# Altium PCB MB_v1.PcbDoc (part 9 of 10)
Units mm, origin at the board's own origin, x right, y up, seen from the top; angles counter-clockwise.
Board outline 203 x 72 mm, 6 copper layers (Top Layer, Layer 3, Layer 1, Layer 2, Layer 4, Bottom Layer), stack 1.52 mm thick; 655 components, 569 nets, 2943 pads, 1834 vias.
Unrouted connection lines stored in the file: 31.
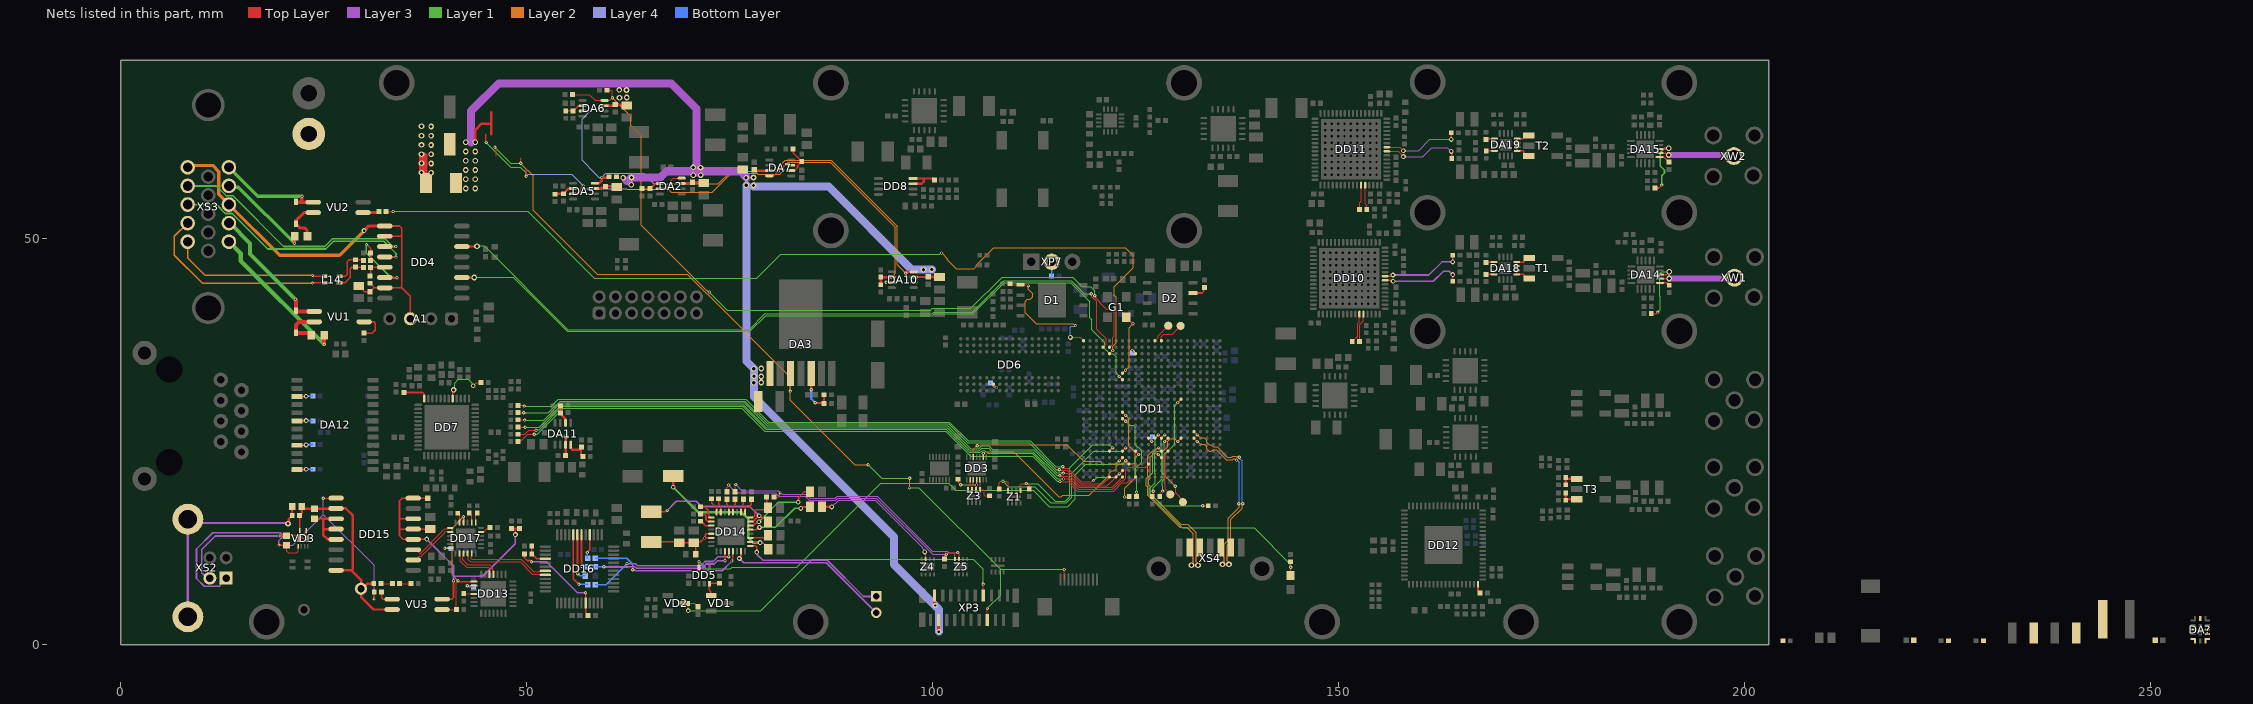
[diagram p12: the nets of this part, all layers, seen from the top]

## Via types
v1: diameter 0.4, hole 0.2, Top Layer to Bottom Layer, tented both sides, 654 vias
v2: diameter 0.8, hole 0.4, Top Layer to Bottom Layer, tented both sides, 489 vias
v3: diameter 0.6, hole 0.3, Top Layer to Bottom Layer, tented both sides, 354 vias
v4: diameter 0.7, hole 0.4, Top Layer to Bottom Layer, tented both sides, 144 vias
v5: diameter 0.8, hole 0.4, Top Layer to Bottom Layer, 87 vias
v6: diameter 0.9, hole 0.5, Top Layer to Bottom Layer, 45 vias
v7: diameter 0.66, hole 0.4, Top Layer to Bottom Layer, 25 vias
v8: diameter 0.7, hole 0.3, Top Layer to Bottom Layer, 13 vias
v9: diameter 0.5, hole 0.2, Top Layer to Bottom Layer, 12 vias
v10: diameter 0.5, hole 0.3, Top Layer to Bottom Layer, 5 vias
v11: diameter 1, hole 0.5, Top Layer to Bottom Layer, 2 vias
v12: diameter 0.4, hole 0.2, Top Layer to Bottom Layer, 2 vias
v13: diameter 0.9, hole 0.4, Top Layer to Bottom Layer, tented both sides, 2 vias

## Nets (pads, with @x,y where several pads share a name; then routed paths per layer and width w, separated by ;. In a path a pad name is that pad's centre, name@x,y a point inside that pad or via, vN(x,y) a via of type N, cw(c..) or ccw(c..) an arc to the next point about the centre after c; other vN are vias at no path point) (continued)
NetC327_2: C327.2 C346.2 DD15.12 DD15.13 DD15.14 DD15.16 R170.1 R172.1 VU3.4 | length 39.2
  Top Layer w0.2: DD15.14@36.043,15.494 34.35,15.494 ; v3@37.725,12.975 37.704,12.954 DD15.12@36.043,12.954 34.796,12.954 34.35,13.4 34.35,14.175 ; C346.2@37.825,18.02 37.811,18.034 DD15.16@36.043,18.034 34.684,18.034 34.35,17.7 34.35,15.494 ; C327.2@38.15,14.225 38.149,14.224 DD15.13@36.043,14.224 34.399,14.224 34.35,14.175 ; VU3.4@39.6,5.585 40.785,5.585 41,5.8 v1(41,7.85) ; R172.1@48.15,14.3 48.65,14.3 ; v3(48.625,13.55) 48.625,14.275 48.65,14.3 ; R170.1@49.15,14.3 48.65,14.3 ; 34.35,14.175 34.35,15.494
  Layer 3 w0.2: v3(37.71,12.99) 40.95,9.75 ; v1(41,7.85) 41,8.4 ; 41,9.75 41,8.4 ; v3(48.625,13.55) 48.625,12.4 44.625,8.4 41,8.4
NetC331_1: C331.1 DD16.30 | length 4.7
  Top Layer w0.2: v1@56.775,9.625 DD16.30@56.775,13.525
  Bottom Layer w0.2: v1(56.775,9.636) 57.479,9.636 C331.1@57.54,9.575
NetC331_2: C331.2 DD14.19 | length 17.7
  Top Layer w0.2: DD14.19@74.425,11.5 74.425,10.35 v1(74.45,10.325)
  Layer 3 w0.2: v1(59.506,9.593) 59.538,9.561 62.541,9.561 62.58,9.6 63.351,9.6 63.551,9.4 71.575,9.4 72.1,9.925 73.124,9.925 73.524,10.325 v1(74.45,10.325)
  Bottom Layer w0.2: C331.2@58.46,9.575 59.525,9.575 v1@59.55,9.55
NetC332_1: C332.1 DD16.32 | length 7.5
  Top Layer w0.2: DD16.32@55.775,13.525 55.775,8.1 v1@56.45,7.425
  Bottom Layer w0.2: v1(56.45,7.436) 57.479,7.436 C332.1@57.54,7.375
NetC332_2: C332.2 DD14.20 | length 18.8
  Top Layer w0.2: v1(74.925,10.8) DD14.20@74.925,11.5
  Layer 3 w0.2: v1(62.375,9.961) 63.414,9.961 63.675,9.7 71.451,9.7 71.976,10.225 73,10.225 73.575,10.8 v1(74.925,10.8)
  Bottom Layer w0.2: C332.2@58.46,7.375 59.8,7.375 v1@62.375,9.95
NetC334_1: C334.1 DD16.28 | length 3.1
  Top Layer w0.2: v1(57.475,11.325) 57.475,11.379 57.775,11.679 DD16.28@57.775,13.525
  Bottom Layer w0.2: v1(57.475,11.325) 57.475,10.69 C334.1@57.54,10.625
NetC334_2: C334.2 DD14.21 | length 19.6
  Top Layer w0.2: v1(75.3,10.3) 75.3,10.354 75.425,10.479 DD14.21@75.425,11.5
  Layer 3 w0.2: v1(63.1,9.2) 63.138,9.162 63.365,9.162 63.426,9.1 74.1,9.1 v1(75.3,10.3)
  Bottom Layer w0.2: C334.2@58.46,10.625 62.35,10.625 63.1,9.875 v1(63.1,9.2)
NetC341_2: C341.2 DD14.1 | length 2.2
  Top Layer w0.2: DD14.1@76.925,16.3 76.925,16.9 77.125,17.1 77.573,17.1 77.69,17.217 77.69,17.867 C341.2@77.728,17.905
NetC342_2: C342.2 DD14.2 | length 1.7
  Top Layer w0.2: DD14.2@76.425,16.3 76.425,16.975 76.702,17.252 C342.2@76.702,17.895
NetC344_2: C344.2 DD14.4 | length 1.7
  Top Layer w0.2: DD14.4@75.425,16.3 75.425,17 75.696,17.271 C344.2@75.696,17.905
NetC345_2: C345.2 DD14.5 | length 1.7
  Top Layer w0.2: C345.2@74.68,17.905 74.675,17.9 74.675,17.25 74.925,17 DD14.5@74.925,16.3
NetC347_1: C347.1 C348.1 DD14.13 DD14.14 L60.2 L61.1 | length 10.4
  Top Layer w0.2: L61.1@65.35,12.65 68.723,12.65 C348.1@68.838,12.535 C347.1@70.616,12.535 ; L60.2@70.865,11.126 70.865,12.514 70.73,12.649 71.449,12.649 v1(71.925,13.125) ; DD14.14@72.775,13.15 71.95,13.15 v1(71.925,13.125) ; DD14.13@72.775,13.65 72.142,13.65 72.025,13.533 72.025,13.279 71.925,13.179 v1(71.925,13.125)
NetC349_1: C349.1 C352.1 C357.2 C358.1 DD15.2 DD15.8 R175.2 R178.2 VD3.5 VU3.2 XS2.4 | length 48.8
  Top Layer w0.2: v1(19.5,13.375) 19.554,13.375 19.606,13.427 C358.1@20.447,13.427 21.658,13.427 21.684,13.401 21.879,13.401 22.004,13.276 VD3.5@22.004,13.081 ; R178.2@22.04,15.875 22.079,15.836 VD3.5@22.079,14.056 22.079,13.156 VD3.5@22.004,13.081 ; VD3.5@22.879,14.056 22.879,13.156 VD3.5@22.954,13.081 VD3.5@22.004,13.081
  Top Layer w0.3: R178.2@22.04,15.875 22.317,16.152 C357.2@22.317,17.018 ; C357.2@22.317,16.993 22.567,16.743 22.725,16.743 22.743,16.725 C349.1@23.875,16.725 26.504,16.725 DD15.2@26.543,16.764 27.736,16.764 28.623,15.877 28.623,9.32 28.447,9.144 ; DD15.8@26.543,9.144 28.447,9.144 ; R175.2@31.189,7.5 30.393,7.5 29.768,6.875 C352.1@29.617,6.875 ; VU3.2@33.45,4.315 31.16,4.315 29.624,5.851 29.624,6.868 C352.1@29.617,6.875 ; 28.447,9.144 29.617,7.974 C352.1@29.617,6.875
  Layer 3 w0.2: XS2.4@10.997,8.183 10.642,8.183 9.997,8.828 9.997,11.697 11.675,13.375 v1(19.5,13.375)
NetC349_2: C349.2 DD15.3 DD15.4 DD15.5 | length 8.2
  Top Layer w0.3: C349.2@23.875,15.525 24.95,15.525 ; DD15.5@26.543,12.954 26.511,12.986 25.464,12.986 24.95,13.5 24.95,14.412 ; DD15.4@26.543,14.224 25.138,14.224 24.95,14.412 ; DD15.3@26.543,15.494 26.537,15.5 25.126,15.5 25.101,15.525 24.95,15.525 ; 24.95,14.412 24.95,15.525
NetC350_1: C350.1 DD14.27 | length 2.3
  Top Layer w0.2: DD14.27@77.575,13.15 79.458,13.15 C350.1@79.769,13.462
NetC351_1: C351.1 DD14.32 R171.1 | length 4.4
  Top Layer w0.2: DD14.32@77.575,15.65 77.585,15.66 77.91,15.66 78.1,15.85 78.1,16.508 78.217,16.625 79.525,16.625 C351.1@79.725,16.825 79.575,16.975 R171.1@79.575,18.175
NetC353_1: C353.1 DD14.31 L61.2 | length 17.1
  Top Layer w0.2: L61.2@65.35,16.35 67.108,16.35 67.283,16.525 v1(67.325,16.525) ; DD14.31@77.575,15.15 77.585,15.16 77.962,15.16 78.107,15.304 78.107,15.356 78.614,15.864 v3(78.65,15.864) ; v3@78.65,15.85 78.669,15.85 78.968,15.551 79.538,15.551 C353.1@79.645,15.444
  Layer 3 w0.2: v1(67.325,16.525) 68.45,17.65 70.925,17.65 71.575,17 77.514,17 v3(78.65,15.864)
NetC354_1: C354.1 DD14.26 L62.2 | length 18.4
  Top Layer w0.2: DD14.26@77.575,12.65 78.567,12.65 78.667,12.55 v3(78.775,12.55) 78.852,12.473 79.202,12.473 79.506,12.169 C354.1@79.506,12.13
  Top Layer w0.3: v3(68.075,19.375) L62.2@68.075,20.75
  Layer 1 w0.3: v3(68.075,19.375) 71.175,16.275 76.5,16.275 77.325,15.45 77.325,13.125 77.9,12.55 v3(78.775,12.55)
NetC355_2: C355.2 DD14.29 | length 8.5
  Top Layer w0.2: DD14.29@77.575,14.15 78.308,14.15 78.591,14.434 v3(78.7,14.434) ; v3(83.775,16.775) 83.883,16.775 84.058,16.95 C355.2@84.9,16.95
  Layer 1 w0.2: v3(78.7,14.434) 80.659,14.434 83.025,16.8 83.75,16.8 v3(83.775,16.775)
NetC356_2: C356.2 DD14.30 | length 9.4
  Top Layer w0.2: DD14.30@77.575,14.65 77.864,14.65 78.048,14.835 78.154,14.835 78.269,14.949 78.335,14.949 78.521,15.135 v3(78.629,15.135) ; v3(83.475,17.525) 83.5,17.55 83.5,18.125 84.175,18.8 C356.2@84.9,18.8
  Layer 1 w0.2: v3(78.629,15.135) 81.044,17.55 83.45,17.55 v3(83.475,17.525)
NetC357_1: C357.1 R178.1 XS2.5 | length 26.9
  Top Layer w0.3: v4(20.625,14.9) 20.702,14.977 20.702,15.437 R178.1@21.14,15.875 21.117,15.898 C357.1@21.117,17.018
  Layer 3 w0.3: XS2.5@8.287,3.413 XS2.5@8.287,15.453 8.763,14.977 20.548,14.977 v4(20.625,14.9)
NetC358_2: C358.2 DD15.1 R169.1 VD3.1 XS2.1 | length 49.5
  Top Layer w0.125: C358.2@20.447,12.227 20.447,11.478 20.625,11.3 21.675,11.3 21.866,11.491 21.866,11.575 21.879,11.588 VD3.1@21.879,12.106 ; v1(24.975,18.025) 24.984,18.034 DD15.1@26.543,18.034 ; v1(31.225,5.625) 31.25,5.65 R169.1@31.25,6.475
  Top Layer w0.2: v1(19.5,12.25) 19.523,12.227 C358.2@20.447,12.227
  Layer 3 w0.125: v1(19.5,12.25) 21.225,12.25 24.975,16 ; v1(24.975,18.025) 24.975,16 ; v1(31.225,5.625) 31.225,9.75 24.975,16
  Layer 3 w0.2: XS2.1@12.997,8.183 12.297,7.483 12.297,7.3 12.18,7.183 10.292,7.183 9.35,8.125 9.35,11.775 11.35,13.775 19.666,13.775 19.9,13.541 19.9,13.209 19.5,12.809 v1(19.5,12.25)
NetC?_1: C?.1@250.628,0.526 DA?.3 DA?.12 L?.1
NetC?_2: C?.2@220.872,0.526 DA?.5
NetD1_1: D1.1 DD1.A1 R22.1 | length 17.2
  Top Layer w0.125: R22.1@109.55,44.45 109.685,44.315 D1.1@110.86,44.315 111.611,44.315 111.751,44.175 v1(111.825,44.175) ; v3(116.985,37.846) 118.191,37.846 DD1.A1@118.612,37.425
  Layer 2 w0.125: v1(111.825,44.175) 111.825,43.779 112.363,43.242 112.363,42.858 112.042,42.538 111.706,42.538 111.425,42.257 111.425,40.85 112.775,39.5 117.319,39.5 117.527,39.291 v1(117.63,39.291)
  Bottom Layer w0.125: v3(116.985,37.846) 116.985,39.116 117.08,39.211 117.549,39.211 v1(117.63,39.291)
NetD2_3: D2.3 R26.2 | length 1.9
  Top Layer w0.2: D2.3@132.098,43.307 133.207,43.307 133.417,43.517 133.417,43.922 R26.2@133.495,44
NetDA2_6: DA2.6 R7.1 R8.1 | length 2.5
  Top Layer w0.2: R8.1@64.212,56.164 R7.1@65.228,56.164 65.843,56.779 66.396,56.779 DA2.6@66.418,56.801
NetDA3_5: DA3.5 R4.1 R9.1 | length 6
  Top Layer w0.25: DA3.5@85.07,33.37 85.075,33.365 v1(85.075,31.4) ; v1(85.575,29.775) 85.604,29.746 86.579,29.746 R9.1@86.65,29.675 R4.1@86.65,30.775
  Bottom Layer w0.25: v1(85.075,31.4) 85.075,30.275 v1(85.575,29.775)
NetDA5_6: DA5.6 R13.1 R14.1 | length 2.3
  Top Layer w0.3: R14.1@53.647,55.537 R13.1@54.536,55.537 55.163,56.164 55.716,56.164 DA5.6@55.726,56.174
NetDA6_6: DA6.6 R15.1 R16.1 | length 2.3
  Top Layer w0.2: R16.1@54.841,65.735 R15.1@55.73,65.735 55.93,65.935 55.96,65.935 56.368,66.343 56.891,66.343 DA6.6@56.92,66.372
NetDA7_6: DA7.6 R17.1 R18.1 | length 3.9
  Top Layer w0.2: DA7.6@82.605,58.383 82.971,58.383 83.046,58.458 83.083,58.458 83.382,58.757 83.382,58.985 R18.1@83.902,59.505 82.838,60.569 82.838,61.042 R17.1@82.828,61.052
NetDA8_1: DA8.1 F1.2 VU1.4 | length 5.4
  Top Layer w0.5: F1.2@23.495,38.1 23.495,38.135 23.275,38.355 23.028,38.355 22.982,38.401 DA8.1@21.59,38.401 21.59,39.34 21.982,39.732 23.83,39.732 VU1.4@23.849,39.751
NetDA9_1: DA9.1 F3.2 VU2.4 | length 5.5
  Top Layer w0.4: F3.2@23.015,50.292 22.962,50.345 22.962,51.066 22.728,51.3 22.153,51.3 21.79,51.663 21.64,51.663 21.59,51.713 DA9.1@21.59,51.863 21.64,51.913 21.64,52.263 22.59,53.213 VU2.4@23.722,53.213
NetDA10_6: DA10.6 R50.1 R51.1 | length 2.3
  Top Layer w0.3: R50.1@93.634,44.319 R51.1@93.634,45.255 93.645,45.266 DA10.6@94.998,45.266
NetDA11_6: DA11.6 R63.1 R64.1 | length 2.3
  Top Layer w0.3: R64.1@54.171,29.395 R63.1@54.171,28.506 54.321,28.356 54.321,28.279 54.798,27.802 54.798,27.326 DA11.6@54.808,27.316
NetDA12_15: DA12.15 R82.1 | length 1.9
  Top Layer w0.125: DA12.15@21.741,30.551 v3@22.821,30.551
  Bottom Layer w0.2: v3(22.86,30.59) 22.877,30.607 R82.1@23.68,30.607
NetDA12_18: DA12.18 R84.1 | length 1.9
  Top Layer w0.125: DA12.18@21.741,27.551 v3@22.821,27.551
  Bottom Layer w0.2: v3(22.86,27.59) 22.891,27.559 R84.1@23.68,27.559
NetDA12_21: DA12.21 R85.1 | length 1.9
  Top Layer w0.125: DA12.21@21.741,24.551 v3@22.821,24.551
  Bottom Layer w0.2: v3(22.86,24.59) 22.908,24.638 R85.1@23.68,24.638
NetDA12_24: DA12.24 R86.1 | length 2
  Top Layer w0.125: DA12.24@21.741,21.551 22.821,21.551 v3(22.86,21.59)
  Bottom Layer w0.2: v3(22.86,21.59) R86.1@23.68,21.59
NetDA14_1: DA14.1 R96.2 | length 1.3
  Top Layer w0.2: DA14.1@189.609,44.565 190.464,44.565 R96.2@190.764,44.265
NetDA14_2: DA14.2 XW1.1 | length 9
  Top Layer w0.2: DA14.2@189.609,45.065 189.619,45.075 190.754,45.075 v4(190.764,45.085)
  Layer 3 w0.7: v4(190.764,45.085) XW1.1@198.645,45.085
NetDA14_3: DA14.3 R88.1 | length 8.3
  Top Layer w0.125: R88.1@188.547,40.767 189.139,40.767 189.322,40.95 v1(189.35,40.95)
  Top Layer w0.2: DA14.3@189.609,45.565 190.409,45.565 190.754,45.91 v4(190.764,45.91)
  Layer 1 w0.125: v1(189.35,40.95) 189.638,41.238 189.638,42.825 189.575,42.888 189.575,45.677 189.808,45.91 v4(190.764,45.91)
NetDA15_1: DA15.1 R97.2 | length 1.4
  Top Layer w0.2: DA15.1@189.546,60.035 189.555,60.026 190.106,60.026 R97.2@190.709,59.423
NetDA15_2: DA15.2 XW2.1 | length 9.3
  Top Layer w0.2: DA15.2@189.546,60.535 190.346,60.535 190.58,60.301 v4(190.709,60.301)
  Layer 3 w0.5: XW2.1@198.59,60.301 XW2.1@198.717,60.174
  Layer 3 w0.7: v4(190.709,60.301) XW2.1@198.59,60.301
NetDA15_3: DA15.3 R91.1 | length 7.8
  Top Layer w0.2: R91.1@189,56.237 189.487,56.237 v1(189.85,56.6) ; DA15.3@189.546,61.035 189.555,61.045 190.627,61.045 v4(190.709,61.126)
  Layer 1 w0.2: v1(189.85,56.6) 189.85,57.759 190.175,58.084 190.175,58.416 189.65,58.941 189.65,60.604 190.173,61.126 v4(190.709,61.126)
NetDA18_5: DA18.5 R110.1 | length 1
  Top Layer w0.2: R110.1@168.175,47.05 168.23,47.105 DA18.5@169.171,47.105
NetDA18_8: DA18.8 R109.1 | length 1
  Top Layer w0.2: R109.1@168.2,45.6 168.205,45.605 DA18.8@169.171,45.605
NetDA18_13: DA18.13 DA18.14 T1.1 | length 2.3
  Top Layer w0.2: DA18.14@171.971,46.105 DA18.13@171.971,45.605 172.783,45.605 172.9,45.488 172.9,45.385 173.18,45.105 T1.1@173.5,45.105
NetDA18_15: DA18.15 DA18.16 T1.3 | length 2.3
  Top Layer w0.2: DA18.15@171.971,46.605 DA18.16@171.971,47.105 172.783,47.105 172.9,47.222 172.9,47.325 173.18,47.605 T1.3@173.5,47.605
NetDA19_5: DA19.5 R112.1 | length 1.1
  Top Layer w0.2: R112.1@168.2,62.2 168.318,62.318 DA19.5@169.231,62.318
NetDA19_8: DA19.8 R111.1 | length 1
  Top Layer w0.2: R111.1@168.225,60.8 168.243,60.818 DA19.8@169.231,60.818
NetDA19_13: DA19.13 DA19.14 T2.1 | length 2.3
  Top Layer w0.2: DA19.14@172.031,61.318 DA19.13@172.031,60.818 172.756,60.818 172.873,60.701 172.873,60.474 173.153,60.194 T2.1@173.445,60.194
NetDA19_15: DA19.15 DA19.16 T2.3 | length 2.1
  Top Layer w0.2: DA19.15@172.031,61.818 DA19.16@172.031,62.318 172.749,62.318 173.125,62.694 T2.3@173.445,62.694
NetDA?_7: DA?.7 R?.1@204.761,0.476 R?.2@229.462,0.476
NetDD1_A12: DD1.A12 X2.1 | length 2.5
  Top Layer w0.125: DD1.A12@127.412,37.425 127.412,37.459 127.8,37.847 127.8,38.028 X2.1@129.048,39.276
NetDD1_A13: DD1.A13 X1.1 | length 3.4
  Top Layer w0.125: DD1.A13@128.212,37.425 128.212,37.941 128.521,38.25 129.557,38.25 X1.1@130.565,39.259
NetDD1_AA7: DD1.AA7 R60.2 | length 79.6
  Top Layer w0.125: R60.2@48.964,29.464 49.562,29.464 49.651,29.375 v1(49.725,29.375) ; v1(116.05,21.9) 116.073,21.9 116.261,21.713 116.674,21.713 118.361,20.025 119.639,20.025 119.814,20.2 v1(119.85,20.2)
  Top Layer w0.2: v1(123.011,21.024) DD1.AA7@123.412,21.425
  Layer 1 w0.125: v1(49.725,29.375) 53.072,29.375 53.922,30.225 76.995,30.225 79.82,27.4 102.095,27.4 104.42,25.075 112.02,25.075 115.195,21.9 v1(116.05,21.9) ; v1(119.85,20.2) 120.275,20.625 122.612,20.625 v1(123.011,21.024)
NetDD1_AB5: DD1.AB5 R65.2 | length 78
  Top Layer w0.125: R65.2@48.964,28.575 49.625,28.575 v1(49.65,28.55) ; v1(115.625,21.537) 115.675,21.488 116.581,21.488 118.268,19.8 120.987,19.8 DD1.AB5@121.812,20.625
  Layer 1 w0.125: v1(49.65,28.55) 52.7,28.55 54.15,30 76.902,30 79.727,27.175 102.002,27.175 104.327,24.85 111.927,24.85 115.238,21.54 115.623,21.54 v1(115.625,21.537)
NetDD1_AB6: DD1.AB6 R66.1 | length 79.5
  Top Layer w0.125: R66.1@48.964,27.686 49.739,27.686 v1(49.775,27.65) ; v1(116.125,21.125) 116.625,21.125 118.175,19.575 121.562,19.575 DD1.AB6@122.612,20.625
  Layer 1 w0.125: v1(49.775,27.65) 52.118,27.65 54.243,29.775 76.809,29.775 79.634,26.95 101.909,26.95 104.734,24.125 105.7,24.125 106.058,24.483 106.94,24.483 107.423,24 112.459,24 115.284,21.175 115.822,21.175 115.849,21.147 116.103,21.147 v1(116.125,21.125)
NetDD1_AB7: DD1.AB7 R67.1 | length 80.6
  Top Layer w0.125: R67.1@48.964,26.797 49.803,26.797 v1(49.825,26.775) ; v1(115.672,20.812) 115.722,20.762 116.628,20.762 118.041,19.35 122.137,19.35 DD1.AB7@123.412,20.625
  Layer 1 w0.125: v1(49.825,26.775) 51.561,26.775 54.336,29.55 76.716,29.55 79.541,26.725 101.816,26.725 104.641,23.9 105.793,23.9 106.064,24.171 106.934,24.171 107.33,23.775 112.366,23.775 115.284,20.857 115.628,20.857 v1(115.672,20.812)
NetDD1_AB9: DD1.AB9 R69.2 | length 82.8
  Top Layer w0.125: R69.2@48.964,25.019 49.073,25.128 49.378,25.128 50.15,25.9 v1(50.95,25.9) ; v1(115.675,20.087) 115.725,20.037 116.113,20.037 116.125,20.026 116.729,20.026 117.855,18.9 122.323,18.9 123.348,19.925 124.025,19.925 124.375,20.275 124.875,20.275 124.959,20.359 124.959,20.572 DD1.AB9@125.012,20.625
  Layer 1 w0.125: v1(50.95,25.9) 50.969,25.919 51.342,25.919 54.523,29.1 76.529,29.1 79.354,26.275 101.629,26.275 104.729,23.175 112.329,23.175 115.364,20.14 115.622,20.14 v1(115.675,20.087)
NetDD1_C9: DD1.C9 R27.1 | length 0.6
  Top Layer w0.2: v1(124.611,36.226) DD1.C9@125.012,35.825
NetDD1_F7: DD1.F7 G1.3 | length 7.8
  Top Layer w0.125: G1.3@123.875,40.305 123.875,40.255 124.362,39.767 124.498,39.767 124.7,39.566 v1(124.7,39.525)
  Top Layer w0.2: DD1.F7@123.412,33.425 v1(123.775,33.788)
  Layer 2 w0.125: v1(123.775,33.788) 124.22,34.233 124.22,39.045 v1(124.7,39.525)
NetDD1_M7: DD1.M7 R47.1 | length 12.2
  Top Layer w0.125: v1(123.701,18.174) 124.199,18.174 R47.1@124.25,18.225
  Top Layer w0.2: DD1.M7@123.412,28.625 v1(123.813,28.224)
  Layer 2 w0.125: v1(123.701,18.174) 123.701,19.283 124.976,20.558 124.976,23.7 124.202,24.474 124.202,27.835 v1(123.813,28.224)
NetDD1_N7: DD1.N7 R48.1 | length 11.2
  Top Layer w0.125: R48.1@125.139,18.212 R48.1@125.139,18.225 v1(125.139,18.775)
  Top Layer w0.2: DD1.N7@123.412,27.825 123.45,27.825 123.776,27.499 v1(123.813,27.499)
  Layer 1 w0.125: v1(123.813,27.499) 124.286,27.027 124.723,27.027 125.012,26.738 125.012,24.625 125.776,23.861 125.776,22.473 125.061,21.758 125.061,20.879 125.139,20.801 v1(125.139,18.775)
NetDD1_T11: DD1.T11 R25.2 | length 1.2
  Top Layer w0.2: DD1.T11@126.612,25.425 v1(127.013,25.024)
  Bottom Layer w0.2: R25.2@127,25.625 127.013,25.612 v1(127.013,25.024)
NetDD1_T12: DD1.T12 HL1.1 R23.2 | length 31.5
  Top Layer w0.125: HL1.1@144.125,8.5 R23.2@144.125,10.2
  Top Layer w0.2: DD1.T12@127.412,25.425 v1(127.813,25.826)
  Layer 1 w0.125: v1(127.813,25.826) 127.443,25.456 127.443,23.943 127.125,23.625 127.125,21.138 126.612,20.625 126.612,18.513 130.75,14.375 139.625,14.375 144.09,9.91 144.09,9.558 v1(144.126,9.522)
NetDD1_T13: DD1.T13 R59.1 | length 16.5
  Top Layer w0.125: v1(133.3,17.1) R59.1@133.975,17.1
  Top Layer w0.2: DD1.T13@128.212,25.425 v1(128.613,25.826)
  Layer 1 w0.125: v1(128.613,25.826) 128.212,25.425 128.212,24.089 127.956,23.833 127.704,23.833 127.412,23.541 127.412,21.103 127.473,21.042 127.473,19.92 126.85,19.297 126.85,18.593 128.343,17.1 v1(133.3,17.1)
NetDD1_T14: DD1.T14 R24.2 | length 8
  Top Layer w0.125: R24.2@127.075,18.225 127.213,18.363 v1(127.213,18.899)
  Top Layer w0.2: v1(128.611,25.024) DD1.T14@129.012,25.425
  Layer 1 w0.125: v1(127.213,18.899) 127.213,19.342 128.322,20.452 128.322,23.732 128.558,23.967 128.558,24.971 v1(128.611,25.024)
NetDD1_T16: DD1.T16 X3.1 | length 10.9
  Top Layer w0.125: v1(129.9,19.5) 129.929,18.708 129.949,18.688 130.85,17.787 X3.1@130.85,17.55
  Top Layer w0.2: v1(130.211,25.024) DD1.T16@130.612,25.425
  Layer 2 w0.125: v1(129.9,19.5) 128.322,21.078 128.322,23.732 128.973,24.383 128.973,25.061 129.275,25.363 129.872,25.363 v1(130.211,25.024)
NetDD1_V14: DD1.V14 X4.1 | length 5.7
  Top Layer w0.125: DD1.V14@129.012,23.825 128.649,23.462 128.649,19.151 X4.1@129.3,18.5
NetDD1_Y11: DD1.Y11 R68.2 | length 85.4
  Top Layer w0.125: R68.2@48.964,25.908 49.783,25.908 50.275,26.4 v1(51.175,26.4) ; v1(116.143,20.4) 116.673,20.4 117.948,19.125 122.23,19.125 123.255,20.15 123.5,20.15 123.825,20.475 123.825,21.551 124.137,21.862 126.249,21.862 DD1.Y11@126.612,22.225
  Layer 1 w0.125: v1(51.175,26.4) 51.228,26.453 51.557,26.453 54.43,29.325 76.623,29.325 79.448,26.5 101.723,26.5 104.548,23.675 105.886,23.675 106.112,23.9 106.436,23.9 106.787,23.55 112.273,23.55 115.373,20.45 116.093,20.45 v1(116.143,20.4)
NetDD4_13: DD4.13 R41.2 R43.1 | length 2.8
  Top Layer w0.2: R41.2@30.734,45.408 30.803,45.477 R43.1@30.803,46.436 30.849,46.482 DD4.13@32.537,46.482
NetDD4_14: DD4.14 R40.1 R42.1 | length 9.8
  Top Layer w0.2: v1(30.275,49.269) 30.313,49.231 30.369,49.231 30.803,48.797 R42.1@30.803,47.325 ; DD4.14@32.537,45.212 34.013,45.212 v1(34.05,45.175)
  Layer 1 w0.2: v1(30.275,49.269) 30.275,48.225 33.325,45.175 v1(34.05,45.175)
NetDD5_3: DD5.3 R37.1 VD1.1 | length 2.8
  Top Layer w0.2: VD1.1@72.737,6.03 72.712,6.055 72.712,6.513 72.532,6.693 DD5.3@72.532,7.484 72.599,7.551 R37.1@73.787,7.551
NetDD6_L8: DD6.L8 R57.1 | length 1.5
  Top Layer w0.2: DD6.L8@107.497,32.066 v1(107.899,31.665)
  Bottom Layer w0.2: R57.1@107.15,32.2 107.647,31.703 107.86,31.703 v1(107.899,31.665)
NetDD7_41: DD7.41 R77.1 | length 6
  Top Layer w0.125: v3(43.434,31.877) 43.815,32.258 R77.1@44.381,32.258
  Top Layer w0.2: DD7.41@40.913,30.302 40.932,30.321 40.932,31.28 v4(41.021,31.369)
  Layer 1 w0.125: v4(41.021,31.369) 41.131,31.479 41.131,31.717 41.143,31.73 41.143,32.216 41.614,32.687 42.799,32.687 43.302,32.184 43.302,32.138 43.434,32.006 v3(43.434,31.877)
NetDD7_48: DD7.48 R80.1 | length 3.1
  Top Layer w0.2: R80.1@34.925,31.046 37.221,31.046 37.338,30.929 37.338,30.729 37.413,30.654 DD7.48@37.413,30.302 DD7.48@37.394,30.321
NetDD8_3: DD8.3 DD8.4 R98.1 | length 4.6
  Top Layer w0.3: DD8.3@97.605,56.755 98.655,56.755 98.946,57.046 98.946,57.295 98.836,57.405 ; DD8.4@97.605,57.405 98.836,57.405 ; R98.1@100.237,57.234 100.066,57.405 98.836,57.405
NetDD10_8: DD10.8 R131.2 | length 9.9
  Top Layer w0.2: DD10.8@155.767,44.873 156.519,44.873 156.642,44.75 v3(156.75,44.75) ; R131.2@164.093,44.75 v3(164.093,45.565)
  Layer 3 w0.2: v3(156.75,44.75) 161.7,44.75 162.95,46 163.658,46 v3(164.093,45.565)
NetDD10_9: DD10.9 R132.2 | length 9.9
  Top Layer w0.2: DD10.9@155.767,45.373 156.465,45.373 156.617,45.525 v3(156.725,45.525) ; v3(164.1,47.135) R132.2@164.1,47.95
  Layer 3 w0.2: v3(156.725,45.525) 161.15,45.525 162.76,47.135 v3(164.1,47.135)
NetDD10_59: DD10.59 R135.1 | length 3.7
  Top Layer w0.125: R135.1@151.714,37.338 152.364,37.988 152.364,39.496 152.592,39.723 DD10.59@152.592,40.698
NetDD10_60: DD10.60 R135.2 | length 3.6
  Top Layer w0.125: R135.2@152.614,37.338 152.614,39.392 153.092,39.87 DD10.60@153.092,40.698
NetDD11_8: DD11.8 R133.2 | length 9.8
  Top Layer w0.125: DD11.8@155.974,60.762 157.388,60.762 158.017,60.133 v3(158.017,60.108)
  Top Layer w0.2: v3(163.9,60.75) 163.9,60.642 163.977,60.565 R133.2@163.977,59.872
  Layer 3 w0.125: v3(158.017,60.108) 160.408,60.108 161.525,61.225 163.425,61.225 v3(163.9,60.75)
NetDD11_9: DD11.9 R134.2 | length 9.5
  Top Layer w0.125: DD11.9@155.974,61.262 157.577,61.262 158.006,60.833 v3(158.017,60.833)
  Top Layer w0.2: v3(163.908,62.233) R134.2@163.908,63.047
  Layer 3 w0.125: v3(158.017,60.833) 159.883,60.833 161.283,62.233 v3(163.908,62.233)
NetDD11_59: DD11.59 R136.1 | length 3.1
  Top Layer w0.125: R136.1@152.603,53.594 152.625,53.616 152.625,54.425 152.799,54.599 DD11.59@152.799,56.587
NetDD11_60: DD11.60 R136.2 | length 3.1
  Top Layer w0.125: DD11.60@153.299,56.587 153.299,54.276 153.503,54.072 R136.2@153.503,53.594
NetDD12_54: DD12.54 R146.1 | length 1.2
  Top Layer w0.2: DD12.54@167.21,7.434 167.21,6.602 R146.1@167.462,6.35
NetDD13_9: DD13.9 R160.1 | length 1.6
  Top Layer w0.2: v1(42.7,7.25) DD13.9@43.525,7.25
  Bottom Layer w0.2: v1(42.7,7.25) 42.754,7.25 42.904,7.1 R160.1@43.45,7.1
NetDD13_11: DD13.11 R161.2 | length 1.3
  Top Layer w0.125: R161.2@42.275,6.275 42.3,6.25 DD13.11@43.525,6.25
NetDD14_7: DD14.7 R184.2 | length 1.8
  Top Layer w0.2: R184.2@73.664,17.961 73.664,17.261 73.925,17 DD14.7@73.925,16.3
NetDD14_8: DD14.8 R185.2 | length 1.9
  Top Layer w0.2: R185.2@72.775,17.961 72.797,17.939 72.797,17.478 73.425,16.85 DD14.8@73.425,16.3
NetDD14_9: DD14.9 R186.2 | length 2.3
  Top Layer w0.2: R186.2@71.447,16.968 71.479,17 71.934,17 72.395,16.539 72.395,16.03 72.537,15.888 72.537,15.673 72.56,15.65 DD14.9@72.775,15.65
NetDD14_10: DD14.10 R187.2 | length 2
  Top Layer w0.2: R187.2@71.447,16.079 71.544,15.982 71.985,15.982 72.103,15.865 72.103,15.372 72.315,15.16 72.765,15.16 DD14.10@72.775,15.15
NetDD14_11: DD14.11 R188.2 | length 1.6
  Top Layer w0.2: R188.2@71.447,15.19 71.647,14.99 71.71,14.99 72.05,14.65 DD14.11@72.775,14.65
NetDD14_23: DD14.23 XP6.2 | length 20.6
  Top Layer w0.2: v3(76.218,10.6) 76.218,10.708 76.415,10.906 76.415,11.49 DD14.23@76.425,11.5
  Layer 3 w0.2: v3(76.218,10.6) 76.743,10.075 86.925,10.075 XP6.2@93.075,3.925
NetDD14_25: DD14.25 XP6.1 | length 18.6
  Top Layer w0.2: DD14.25@77.575,12.15 78.246,12.15 78.363,12.033 v3(78.363,11.38)
  Layer 3 w0.2: v3(78.363,11.38) 78.44,11.303 78.44,11.06 79.125,10.375 87.049,10.375 91.499,5.925 XP6.1@93.075,5.925
NetDD16_31: DD16.31 L57.1 | length 5.8
  Top Layer w0.2: DD16.31@56.275,13.525 56.275,8.775 v1@56.325,8.725
  Bottom Layer w0.2: v1(56.325,8.736) 56.586,8.475 L57.1@57.22,8.475
NetDD16_40: DD16.40 R10.1 R155.1 | length 2.9
  Top Layer w0.2: R155.1@50.65,12.15 R10.1@50.65,11.175 51.25,10.575 DD16.40@52.325,10.575
NetDD17_11: DD17.11 R163.1 | length 1.3
  Top Layer w0.125: DD17.11@44.4,13.875 44.42,13.895 44.77,13.895 45.111,14.236 45.361,14.236 R163.1@45.525,14.4
NetDD17_13: DD17.13 R167.2 | length 1.2
  Top Layer w0.125: DD17.13@43.75,15.025 43.75,16.025 R167.2@43.925,16.2
NetDD17_14: DD17.14 R166.2 | length 1.3
  Top Layer w0.125: R166.2@42.95,16.2 43.25,15.9 DD17.14@43.25,15.025
NetDD17_17: DD17.17 R165.1 | length 1.2
  Top Layer w0.125: R165.1@41.525,16.175 41.75,15.95 DD17.17@41.75,15.025
NetDD17_24: DD17.24 R164.2 | length 1.4
  Top Layer w0.125: v1(39.95,11.875) DD17.24@40.6,11.875
  Bottom Layer w0.2: v1(39.95,11.875) 40.673,11.875 R164.2@40.693,11.855
NetL14_2: L14.2 R42.2 R46.1 | length 4.7
  Top Layer w0.2: L14.2@26.96,45.358 27.683,45.358 27.9,45.575 27.9,47.125 28.169,47.394 R46.1@28.956,47.394 29.834,47.394 R42.2@29.903,47.325
NetL14_3: L14.3 R43.2 R46.2 | length 4.4
  Top Layer w0.2: L14.3@26.96,44.558 27.633,44.558 28.3,45.225 28.3,46.3 28.473,46.473 28.935,46.473 R46.2@28.956,46.494 29.845,46.494 R43.2@29.903,46.436
NetL58_1: L58.1 XP1.1 | length 2.1
  Top Layer w1: v4@37.282,58.134 v4@37.282,60.157 ; L58.1@37.75,57.1 L58.1@37.75,57.225
  other v4: 38.25,58.123 37.062,58.134 38.25,59.261 37.062,59.272 37.062,60.411 38.25,60.4 37.062,61.55 38.25,61.539 37.062,62.688 38.25,62.677 37.062,63.836 38.25,63.825
NetR12_1: R12.1 XP7.2 | length 1.8
  Bottom Layer w0.2: R12.1@114.675,45.4 114.7,45.425 XP7.2@114.7,47.15
NetR38_2: R38.2 VU1.1 | length 3.8
  Top Layer w0.2: R38.2@29.972,38.365 31.015,38.365 31.35,38.7 31.35,39.575 31.174,39.751 VU1.1@29.999,39.751
NetR39_2: R39.2 VU2.1 | length 2
  Top Layer w0.4: VU2.1@29.872,53.213 31.681,53.213 R39.2@31.808,53.34
NetR152_1: R152.1 R153.1 T3.1 | length 2.3
  Top Layer w0.3: R153.1@178.014,18.669 R152.1@178.014,17.78 178.141,17.907 T3.1@179.358,17.907
NetR154_1: R154.1 R157.1 T3.3 | length 2.3
  Top Layer w0.3: R157.1@178.014,19.685 R154.1@178.014,20.574 178.181,20.407 T3.3@179.358,20.407
NetR169_2: R169.2 VU3.1 | length 2.1
  Top Layer w0.2: R169.2@32.15,6.475 32.15,5.75 32.315,5.585 VU3.1@33.45,5.585
NetR175_1: R175.1 R176.2 | length 1.4
  Top Layer w0.125: R175.1@32.089,7.5 R176.2@33.475,7.5
NetR176_1: R176.1 R177.2 | length 1.4
  Top Layer w0.125: R176.1@34.375,7.5 R177.2@35.761,7.5
OUT_422A: L14.1 XS3.11 | length 19.8
  Top Layer w0.2: v1(23.625,45.475) 23.679,45.475 23.796,45.358 L14.1@25.11,45.358
  Layer 2 w0.2: XS3.11@8.263,49.625 8.263,47.612 10.4,45.475 v1(23.625,45.475)
OUT_422B: L14.4 XS3.12 | length 24.6
  Top Layer w0.2: v1(23.65,44.525) 23.683,44.558 L14.4@25.11,44.558
  Layer 2 w0.2: XS3.12@8.263,51.915 6.625,50.277 6.625,47.95 10.05,44.525 v1(23.65,44.525)
OUT_422Y: DD4.11 XS3.14 | length 30.9
  Top Layer w0.2: DD4.11@32.537,49.022 33.897,49.022 v1(33.9,49.025)
  Layer 1 w0.2: XS3.14@8.273,56.485 11.797,56.485 12.977,55.305 13.799,55.305 20.079,49.025 25.151,49.025 26.095,49.969 32.563,49.969 33.508,49.025 v1(33.9,49.025)
OUT_422Z: DD4.12 XS3.13 | length 30.8
  Top Layer w0.2: DD4.12@32.537,47.752 32.564,47.725 v1(33.925,47.725)
  Layer 1 w0.2: XS3.13@8.263,54.205 8.308,54.16 11.832,54.16 12.887,53.105 13.745,53.105 18.125,48.725 25.275,48.725 26.219,49.669 32.421,49.669 33.925,48.165 v1(33.925,47.725)
OUT_GND: A1.3 C82.1 C83.1 DD4.9 DD4.10 DD4.15 R41.1 XS3.3 XS3.15 | length 54.6
  Top Layer w0.2: C82.1@29.337,44.172 29.487,44.172 29.887,43.772 29.887,43.622 30.044,43.465 C83.1@30.734,43.465 31.211,43.942 ; R41.1@30.734,44.508 31.211,44.031 31.211,43.942 ; DD4.10@32.537,50.292 32.545,50.3 34.633,50.3 ; DD4.9@32.537,51.562 34.363,51.562 34.633,51.292 34.633,43.942 ; A1.3@35.687,40.132 35.687,42.888 34.633,43.942 ; 31.211,43.942 DD4.15@32.537,43.942 34.633,43.942
  Top Layer w0.4: v3@30.003,50.981 30.584,51.562 DD4.9@32.537,51.562
  Layer 2 w0.4: XS3.15@8.263,58.785 8.496,59.018 11.344,59.018 12.104,58.258 12.104,55.444 XS3.3@13.343,54.205 19.598,47.95 26.975,47.95 v3@30,50.975
  other v3: 29.994,50.981
OUT_RS422_RX: DD1.G7 DD4.3 | length 95.1
  Top Layer w0.2: DD4.3@42.037,45.212 v4(43.561,45.212) ; v1(123.012,33.028) v1(123.012,33.028) 123.412,32.626 DD1.G7@123.412,32.625
  Layer 1 w0.125: v4@43.561,45.225 48.35,45.225 55,38.575 77.505,38.575 79.455,40.525 100.051,40.525 100.247,40.722 104.997,40.722 108.853,44.578 117.018,44.578 119.35,42.245 119.35,40.285 119.619,40.016 119.619,38.774 121.2,37.193 121.2,36.463 121.813,35.85 122.225,35.85 122.613,35.462 122.613,33.426 v1(123.012,33.028)
OUT_RS422_TX: DD1.B4 DD4.6 | length 92.5
  Top Layer w0.125: DD4.6@42.037,49.022 DD4.6@42.076,49.061 ; v1(119.553,43.2) 119.606,43.147 119.606,42.856 119.938,42.524 120.007,42.524 120.238,42.294 120.238,41.492 120.213,41.467 120.213,38.863 121.4,37.675 121.4,37.013 DD1.B4@121.012,36.625
  Top Layer w0.2: DD4.6@42.076,49.061 42.101,49.036 43.886,49.036 v4(43.9,49.05)
  Layer 1 w0.125: v4(43.9,49.05) 43.95,49.1 44.793,49.1 55.093,38.8 77.411,38.8 79.361,40.75 99.957,40.75 100.154,40.947 104.903,40.947 108.759,44.803 117.111,44.803 118.714,43.2 v1(119.553,43.2)
PG_1V5: DA2.4 DA5.4 DA6.7 DA7.4 DA10.4 R2.1 | length 65.5
  Top Layer w0.125: DA6.7@56.92,65.722 57.822,65.722 v1(57.825,65.725) ; v1(67.825,56.75) 67.825,57.2 68.076,57.451 DA2.4@69.118,57.451 ; DA7.4@79.905,57.733 79.935,57.763 80.463,57.763 v1(81.025,58.325)
  Top Layer w0.3: DA5.4@58.426,56.824 58.436,56.834 58.984,56.834 59.25,57.1 v1(59.25,57.525) 60.025,57.525 60.15,57.65 R2.1@60.15,57.7 ; v1(96.725,45.725) 96.752,45.725 96.943,45.916 DA10.4@97.698,45.916
  Layer 2 w0.125: v1(67.825,56.75) 73.637,56.75 75.212,58.325 v1(81.025,58.325) 81.025,58.788 81.887,59.65 87.525,59.65 95.65,51.525 95.65,46.8 v1(96.725,45.725)
  Layer 4 w0.125: v1(57.825,65.725) 56.838,64.737 56.838,59.637 58.405,58.07 58.949,57.525 v1(59.25,57.525) 59.763,58.037 64.407,58.037 65.694,56.75 v1(67.825,56.75)
PG_5V0: DA2.7 DA5.7 DA7.7 DA10.7 DA?.8 R?.2@225.137,0.476 | length 72.8
  Top Layer w0.2: 45,62.85 45,61.875 v1@45.025,61.85 ; v1(49.95,57.675) 49.95,58.5 ; DA5.7@55.726,55.524 56.43,55.524 56.621,55.715 56.621,56.128 56.981,56.487 v1(56.981,56.495) ; DA2.7@66.418,56.151 66.425,56.144 67.368,56.144 v1(67.375,56.137) ; v1(81.6,58.425) 81.638,58.463 81.638,58.888 81.783,59.033 DA7.7@82.605,59.033 ; v1(94.291,44.616) DA10.7@94.998,44.616
  Layer 1 w0.125: v1(45.03,61.853) 45.03,61.815 48.045,58.8 49.25,58.8 49.95,58.1 v1(49.95,57.675)
  Layer 2 w0.125: v1(67.375,56.137) 67.824,55.688 72.894,55.688 75.243,58.038 78.431,58.038 78.506,57.962 81.175,57.962 81.6,58.387 v1(81.6,58.425) 81.6,58.85 82.175,59.425 87.432,59.425 95.425,51.432 95.425,45.75 v1(94.291,44.616)
  Layer 4 w0.125: v1(49.95,57.675) 50.187,57.913 55.563,57.913 v1(56.981,56.495) 57.313,56.163 62.293,56.163 62.343,56.112 67.35,56.112 v1(67.375,56.137)
PG_ALL: C67.2 DA6.4 DD1.B5 R28.1 | length 95.1
  Top Layer w0.125: C67.2@55.652,67.737 57.738,67.737 58.453,67.022 DA6.4@59.62,67.022 60.247,67.022 60.575,67.35 60.575,68.15 60.438,68.287 R28.1@59.892,68.287 ; v1(120,42.975) 120,42.901 120.137,42.763 120.137,42.712 120.637,42.212 120.637,42.084 121.397,41.325 121.935,41.325 122.375,40.885 122.375,38 122.2,37.825 122.2,37.013 DD1.B5@121.812,36.625
  Layer 1 w0.125: v1(72.506,43.425) 74.731,41.2 99.771,41.2 99.971,41.4 104.72,41.4 108.573,45.253 117.298,45.253 118.475,44.075 119.237,44.075 119.25,44.088 119.5,44.088 120,43.588 v1(120,42.975)
  Layer 2 w0.125: v1(60.578,67.353) 62.85,65.081 62.85,63.95 64.123,62.677 64.123,51.652 72.11,43.665 72.198,43.665 72.438,43.425 v1(72.506,43.425)
PG_ETH0: DA11.4 R62.1 R70.2 | length 2.8
  Top Layer w0.3: DA11.4@55.458,24.616 55.468,24.606 55.468,24.191 55.659,24 56.769,24 ; R70.2@56.612,24.158 56.711,24.058 R62.1@56.711,23.241
PTT: DD1.V9 DD5.6 | length 66
  Top Layer w0.125: DD5.6@71.232,9.534 71.232,10.182 v1(71.25,10.2)
  Top Layer w0.2: DD1.V9@125.012,23.825 v1(125.413,23.424)
  Layer 1 w0.125: v1(71.25,10.2) 72.12,9.33 75.105,9.33 75.325,9.55 83.295,9.55 93.633,19.888 101.983,19.888 102.87,19 112.408,19 114.406,17.002 116.652,17.002 117.6,17.95 117.6,20.942 118.883,22.225 121.781,22.225 121.817,22.261 124.647,22.261 124.649,22.264 124.761,22.264 124.973,22.476 124.973,22.588 124.976,22.59 124.976,22.986 v1(125.413,23.424)
PTT_IN: C86.2 VD2.3 XP3.14 | length 44.9
  Top Layer w0.125: v3(69.925,4.175) 69.925,4.908 70.097,5.08 70.691,5.08 C86.2@71.12,4.651 ; XP3.14@106.261,6.034 v1@106.261,7.436
  Layer 1 w0.125: v3(69.925,4.175) 78.875,4.175 85.216,10.516 105.009,10.516 106.275,9.25 v1(106.275,7.45)
PTT_OUT_N: DA8.2 VU1.3 XS3.2 | length 16.6
  Top Layer w0.5: v1(21.55,42.525) 21.59,42.485 DA8.2@21.59,41.101 ; DA8.2@21.59,41.021 VU1.3@23.849,41.021
  Layer 1 w0.5: XS3.2@13.343,51.915 13.46,51.915 15.95,49.425 15.95,48.125 v1(21.55,42.525)
PTT_OUT_P: F1.1 XS3.1 | length 18.6
  Top Layer w0.5: v1(25.075,37) F1.1@25.075,38.1
  Layer 1 w0.5: XS3.1@13.343,49.625 14.8,48.168 14.8,47.275 v1(25.075,37)
PUDC_B: DD1.K16 R61.1 | length 13.2
  Top Layer w0.125: R61.1@128,18.225 128.039,18.264 128.039,18.639 128.3,18.9 v1(128.367,18.9)
  Top Layer w0.2: v1(130.211,29.824) DD1.K16@130.612,30.225
  Layer 1 w0.125: v1(128.367,18.9) 128.367,19.514 128.3,19.582 128.3,20.111 128.572,20.383 128.572,23.447 129.825,24.7 129.825,29.438 v1(130.211,29.824)
PWR_EN: XP3.15 | length 108.7
  Top Layer w0.125: v1@46.1,61.25 46.3,61.05 46.3,60.15 ; v1@49.3,59.275 49.3,59.9 49.35,59.95 ; v1(82.5,31.225) 82.5,33.34 82.53,33.37 ; XP3.15@106.761,3.034 106.761,4.436 v1(106.775,4.45) ; v1(116.225,9.25) 116.25,9.225 116.25,8
  Layer 1 w0.125: v1(46.105,61.253) 48.08,59.278 v1(49.305,59.278) ; v1(92.075,22.15) 93.75,20.475 v1(97.2,20.475) ; v1(97.175,19.3) 98.34,19.3 108.39,9.25 ; v1(106.775,4.45) 108.39,6.065 108.39,9.25 ; v1(116.225,9.25) 108.39,9.25
  Layer 2 w0.125: v1(49.305,59.278) 49.305,59.22 50.8,57.725 50.8,53.525 58.725,45.6 69.825,45.6 72.144,43.281 72.144,43.275 72.356,43.062 72.363,43.062 82.5,32.925 v1(82.5,31.225) 82.5,30.1 90.45,22.15 v1(92.075,22.15) ; v1(97.175,19.3) 97.188,19.313 97.188,20.463 v1(97.2,20.475)
REGV: C251.2 DD16.8 R10.2 | length 12.7
  Top Layer w0.2: R10.2@49.75,11.175 49.75,10.675 50.075,10.35 50.425,10.35 v1@50.6,10.175 ; v1(57.275,6.375) DD16.8@57.275,5.125 57.275,3.89 C251.2@57.59,3.575
  Layer 3 w0.2: v1(50.6,10.186) 52.464,10.186 56.275,6.375 v1(57.275,6.375)
RHP: C355.1 Z4.3 | length 16.7
  Top Layer w0.125: v3(99.052,11.414) 99.052,11.286 99.175,11.163 Z4.3@99.175,10.55
  Top Layer w0.3: C355.1@86.4,16.95 v3(87.6,16.95)
  Layer 3 w0.125: v3(87.6,16.95) 88.45,17.8 92.944,17.8 98.802,11.942 98.802,11.793 99.052,11.543 v3(99.052,11.414)
RMICN: C345.1 R173.2 Z5.4 | length 34.2
  Top Layer w0.125: C345.1@74.68,18.825 74.68,19.343 74.913,19.576 v1(74.913,19.65) ; R173.2@101.5,10.525 101.5,11.1 v1@101.602,11.202 ; v1(101.7,11.103) v1@101.602,11.202 ; Z5.4@102.775,10.55 102.775,11.125 102.6,11.3 101.7,11.3 v1@101.602,11.202
  Layer 3 w0.125: v1(74.913,19.65) 75.837,18.725 80.618,18.725 81.068,18.275 84.35,18.275 84.837,17.787 88.119,17.787 88.357,18.025 93.095,18.025 100.017,11.103 v1(101.7,11.103)
RMICP: C344.1 R171.2 Z5.3 | length 33.9
  Top Layer w0.125: C344.1@75.696,18.825 75.696,19.572 75.775,19.651 v1(75.775,19.725) ; R171.2@80.475,18.175 80.95,18.175 81.186,18.411 81.186,18.627 v1(81.239,18.68) ; v1(103.107,11.328) 103.107,11.254 103.275,11.086 Z5.3@103.275,10.55
  Layer 3 w0.125: v1(75.775,19.725) 76.538,18.962 81.029,18.962 81.239,18.752 v1(81.239,18.68) ; v1@81.275,18.716 81.277,18.716 81.494,18.5 84.443,18.5 84.931,18.012 88.026,18.012 88.264,18.25 93.189,18.25 99.973,11.466 101.85,11.466 101.988,11.328 v1(103.107,11.328)
RS422_RX: DD1.Y8 DD3.2 | length 23.1
  Top Layer w0.125: DD3.2@106.247,23.095 106.254,23.102 106.254,23.53 v1(106.262,23.538)
  Top Layer w0.2: v1(123.811,22.626) DD1.Y8@124.212,22.225
  Layer 2 w0.125: v1(106.262,23.538) 106.336,23.538 106.523,23.725 110.025,23.725 115.55,18.2 115.87,18.2 116.072,18.402 119.33,18.402 121.804,20.876 121.804,21.129 122.083,21.408 122.345,21.408 122.617,21.68 122.617,21.943 122.874,22.2 123.384,22.2 v1(123.811,22.626)
RS422_TX: DD1.W7 DD3.5 | length 20.9
  Top Layer w0.125: DD3.5@105.047,23.095 105.047,24.047 105.488,24.488 v1(105.525,24.488)
  Top Layer w0.2: v1(123.011,22.624) DD1.W7@123.412,23.025
  Layer 2 w0.125: v1(105.525,24.488) 105.578,24.54 105.797,24.54 105.882,24.625 116.549,24.625 118.611,22.563 120.642,22.563 120.98,22.225 122.581,22.225 122.98,22.624 v1(123.011,22.624)
RS422A: DD3.12 R35.1 Z3.5 | length 3
  Top Layer w0.125: DD3.12@105.847,20.305 105.875,20.277 Z3.5@105.875,19.065 106.268,19.065 106.375,18.958 106.375,18.4 106.45,18.325 R35.1@107.025,18.325
RS422B: DD3.11 R36.2 Z3.6 | length 4
  Top Layer w0.125: R36.2@103.161,20.361 103.228,20.294 103.228,19.947 v1(103.5,19.675) ; Z3.6@105.375,19.065 105.4,19.09 105.4,19.625 105.436,19.661 105.436,20.294 DD3.11@105.447,20.305
  Layer 1 w0.125: v1(103.5,19.675) 105.4,19.675 v1(105.425,19.65)
RS422Y: DD3.9 Z3.8 | length 1.4
  Top Layer w0.125: Z3.8@104.375,19.065 104.394,19.084 104.394,19.494 104.647,19.747 DD3.9@104.647,20.305
RS422Z: DD3.10 Z3.7 | length 1.3
  Top Layer w0.125: Z3.7@104.875,19.065 104.875,19.554 105.047,19.726 DD3.10@105.047,20.305
SERCLK_N: DD1.T18 XS4.5 | length 23
  Top Layer w0.125: XS4.5@135.49,11.95 135.49,11.25 135.828,10.912 135.889,10.912 135.963,10.839 135.963,10.236 135.725,9.998 v4(135.725,9.875)
  Top Layer w0.2: DD1.T18@132.212,25.425 v1(132.613,25.024)
  Layer 2 w0.125: v1(132.613,25.024) 132.976,24.661 133.489,24.661 133.782,24.368 133.782,24.106 134.075,23.812 134.375,23.812 134.577,24.015 134.938,24.015 136.203,22.75 137.01,22.75 137.136,22.876 137.239,22.876 137.39,22.725 v1(137.45,22.725) ; v4(135.725,9.875) 135.725,9.998 135.963,10.236 135.963,12.373 136.45,12.861 136.45,15.55 137.813,16.912 137.813,17.176 137.725,17.263 v1(137.725,17.337)
  Bottom Layer w0.125: v1(137.45,22.725) 137.503,22.672 137.626,22.672 137.813,22.486 137.813,19.951 v1@137.813,17.499
SERCLK_P: DD1.R18 XS4.6 | length 23.6
  Top Layer w0.125: v4(136.525,9.875) 136.525,9.998 136.288,10.236 136.288,10.839 136.361,10.912 136.423,10.912 136.76,11.25 XS4.6@136.76,11.95
  Top Layer w0.2: DD1.R18@132.212,26.225 v1(132.613,25.824)
  Layer 2 w0.125: v1(132.613,25.824) 132.979,25.458 133.489,25.458 133.792,25.155 133.792,24.936 134.09,24.638 134.275,24.638 134.573,24.34 135.073,24.34 136.337,23.075 136.875,23.075 137.001,23.201 137.374,23.201 137.444,23.131 137.751,23.131 v1(137.804,23.079) ; v4(136.525,9.875) 136.525,9.998 136.288,10.236 136.288,12.239 136.775,12.727 136.775,15.415 138.138,16.778 138.138,17.176 138.225,17.263 v1(138.225,17.337)
  Bottom Layer w0.125: v1(137.804,23.079) 137.856,23.026 137.856,22.902 138.138,22.621 138.138,19.817 v1@138.138,17.499
SERDATA_N: DD1.W13 XS4.3 | length 20.7
  Top Layer w0.125: v4(132.715,9.775) 132.715,9.898 132.477,10.136 132.477,10.839 132.551,10.912 132.613,10.912 132.95,11.25 XS4.3@132.95,11.95
  Top Layer w0.2: v1(127.811,23.426) DD1.W13@128.212,23.025
  Layer 2 w0.125: v1(127.811,23.426) 127.758,23.479 127.494,23.479 127.36,23.612 126.85,23.102 126.85,20.514 126.652,20.316 126.652,19.694 126.85,19.497 126.85,18.55 130.6,14.8 131.46,14.8 132.477,13.782 132.477,10.136 132.715,9.898 v4(132.715,9.775)
SERDATA_P: DD1.V13 XS4.2 | length 21.3
  Top Layer w0.125: XS4.2@131.68,11.95 131.68,11.25 132.018,10.912 132.079,10.912 132.152,10.839 132.152,10.136 131.915,9.898 v4(131.915,9.775)
  Top Layer w0.2: v1(127.837,24.226) 127.837,24.213 128.212,23.838 DD1.V13@128.212,23.825
  Layer 2 w0.125: v1(127.837,24.226) 127.763,24.226 127.533,23.997 127.285,23.997 126.525,23.237 126.525,20.648 126.327,20.45 126.327,19.56 126.525,19.362 126.525,18.415 130.465,14.475 131.325,14.475 132.152,13.648 132.152,10.136 131.915,9.898 v4(131.915,9.775)
TUNE: DD1.C5 R39.1 | length 112.7
  Top Layer w0.125: R39.1@32.708,53.34 33.565,53.34 v1(33.575,53.35)
  Top Layer w0.2: DD1.C5@121.812,35.825 v1(122.213,36.226)
  Layer 1 w0.125: v1(33.575,53.35) 50.15,53.35 58.362,45.138 78.353,45.138 81.316,48.1 100.9,48.1 100.932,48.132 100.945,48.132 101.05,48.238 v1(101.125,48.238)
  Layer 2 w0.125: v1(101.125,48.238) 101.848,47.515 101.848,47.37 102.93,46.287 105.117,46.287 105.388,46.558 105.388,46.744 107.544,48.9 123.757,48.9 124.713,47.944 124.713,46.418 122.387,44.093 122.387,43.032 122.625,42.794 122.625,37.15 122.213,36.738 v1(122.213,36.226)
TUNE_OUT_N: DA9.2 VU2.3 XS3.5 | length 13.4
  Top Layer w0.4: DA9.2@21.59,54.563 21.59,54.533 21.64,54.483 22.3,54.483 ; v1(22.35,55.225) 22.3,55.175 22.3,54.483 ; VU2.3@23.722,54.483 22.3,54.483
  Layer 1 w0.4: XS3.5@13.343,58.785 16.903,55.225 v1(22.35,55.225)
TUNE_OUT_P: F3.1 XS3.4 | length 11.9
  Top Layer w0.4: v1(21.425,49.425) 21.425,50.282 F3.1@21.435,50.292
  Layer 1 w0.4: XS3.4@13.343,56.495 13.498,56.34 14.51,56.34 v1(21.425,49.425)
TX_FAIL: DD1.V7 R30.2 Z1.8 | length 24.3
  Top Layer w0.125: R30.2@108.225,19.175 108.225,19.904 108.424,20.103 108.678,20.103 v1(108.7,20.125) 109.125,20.125 109.325,19.925 Z1.8@109.325,18.975
  Top Layer w0.2: DD1.V7@123.412,23.825 v1(123.813,24.226)
  Layer 1 w0.125: v1(108.7,20.125) 109.363,19.462 112.582,19.462 114.592,17.452 116.466,17.452 117.15,18.136 117.15,21.129 119.842,23.821 123.408,23.821 v1(123.813,24.226)
TX_ON: DD1.V5 R29.2 Z1.5 | length 19.6
  Top Layer w0.125: Z1.5@110.825,18.975 110.825,19.625 111.025,19.825 v1(111.55,19.825) 111.603,19.772 111.753,19.772 111.925,19.6 R29.2@111.925,19.15
  Top Layer w0.2: DD1.V5@121.812,23.825 v1(122.213,24.226)
  Layer 1 w0.125: v1(111.55,19.825) 112.975,19.825 115.123,17.677 116.373,17.677 116.925,18.23 116.925,21.802 119.75,24.627 121.813,24.627 v1(122.213,24.226)
USBD1_N: DD13.5 DD17.2 | length 5.7
  Top Layer w0.125: DD17.2@41.75,11.225 41.75,10.932 41.837,10.844 41.837,10.29 42.628,9.5 45.307,9.5 45.513,9.294 45.513,9.096 45.425,9.009 DD13.5@45.425,8.65
USBD1_P: DD13.4 DD17.3 | length 5.7
  Top Layer w0.125: DD17.3@42.25,11.225 42.25,10.932 42.162,10.844 42.162,10.425 42.763,9.825 45.441,9.825 45.838,9.429 45.838,9.096 45.925,9.009 DD13.4@45.925,8.65
USBD2_N: DD16.44 DD17.4 | length 11.1
  Top Layer w0.125: DD17.4@42.75,11.225 42.75,10.932 42.837,10.844 42.837,10.461 43.101,10.197 49.203,10.197 50.738,8.663 51.64,8.663 51.728,8.575 DD16.44@52.325,8.575
USBD2_P: DD16.43 DD17.5 | length 10.5
  Top Layer w0.125: DD17.5@43.25,11.225 43.25,10.932 43.162,10.844 43.162,10.595 43.236,10.522 49.338,10.522 50.872,8.988 51.64,8.988 51.728,9.075 DD16.43@52.325,9.075
USBD_N: DD15.11 DD17.19 | length 6.2
  Top Layer w0.125: DD15.11@36.043,11.684 36.514,11.684 36.733,11.465 36.733,11.285 36.806,11.211 36.91,11.211 39.634,13.936 39.634,14.024 39.898,14.287 40.219,14.287 40.307,14.375 DD17.19@40.6,14.375
USBD_P: DD15.10 DD17.20 | length 6.4
  Top Layer w0.125: DD15.10@36.043,10.414 DD15.10@36.514,10.414 ; DD15.10@36.703,10.414 DD15.10@36.514,10.414 ; DD17.20@40.6,13.875 40.307,13.875 40.219,13.962 40.032,13.962 39.959,13.889 39.959,13.801 37.045,10.886 36.806,10.886 36.733,10.813 36.733,10.633 DD15.10@36.514,10.414
VBUS_ISO: DD13.8 DD17.16 R168.2 VU3.3 | length 16.9
  Top Layer w0.125: VU3.3@39.6,4.315 R168.2@41.375,4.315 ; R168.2@41.375,4.3 R168.2@41.375,4.315 ; v1(41.575,7.85) 41.575,7.839 41.375,7.639 R168.2@41.375,4.315
  Top Layer w0.2: v1(41.575,7.85) 41.629,7.85 41.729,7.75 DD13.8@43.525,7.75 ; v1(42.225,15.75) 42.244,15.731 42.244,15.031 DD17.16@42.25,15.025
  Layer 2 w0.125: v1(41.575,7.85) 41.55,7.85 40.825,8.575 40.825,14.35 v1(42.225,15.75)
VCC_5V0: C128.2 DA11.3 | length 2.4
  Top Layer w0.3: C128.2@54.816,23.299 54.812,23.303 54.812,24.612 DA11.3@54.808,24.616 54.818,24.626 54.818,25.618 v3(54.85,25.65)
VCC_12V0: C1.2 C2.1 C4.2 C8.2 C9.2 C10.2 C11.2 C15.2 C16.2 C17.2 C87.2 C88.2 C?.2@235.688,1.426 C?.2@240.913,1.426 DA2.3 DA3.1 DA3.3 DA5.3 DA6.3 DA7.3 DA10.3 DA?.2 DA?.9 DA?.10 L58.2 R2.2 XP3.2 XP3.3 | length 170.6
  Top Layer w0.3: v4(43.7,61.877) 43.7,63.4 44.475,64.175 45.665,64.175 ; 45.65,62.85 45.658,62.858 45.658,64.168 45.665,64.175 ; 45.675,65.55 45.665,65.54 45.665,64.175 ; DA5.3@58.426,56.174 58.765,56.174 58.791,56.2 59.175,56.2 59.241,56.266 59.573,56.266 C15.2@59.743,56.436 61.049,56.436 C8.2@61.14,56.345 ; DA6.3@59.62,66.372 60.8,66.372 C16.2@60.937,66.509 62.243,66.509 C9.2@62.334,66.418 ; R2.2@61.04,57.59 R2.2@61.075,57.625 ; DA2.3@69.118,56.801 70.3,56.801 C11.2@70.435,56.936 71.741,56.936 C1.2@71.832,56.845 ; C17.2@78.06,58.493 78.16,58.393 79.896,58.393 DA7.3@79.905,58.383 ; DA10.3@97.698,45.266 97.708,45.276 99.455,45.276 C88.2@99.476,45.297 100.83,45.297 C87.2@100.873,45.254
  Top Layer w0.4: XP3.2@100.261,6.034 100.261,4.924 100.323,4.863 v3(100.323,4.809) ; XP3.3@100.761,3.034 100.761,1.693 100.8,1.654 v3(100.8,1.6)
  Layer 3 w1: 43.148,61.85 43.175,61.877 43.175,65.725 46.575,69.125 67.825,69.125 70.95,66 70.95,58.75 ; 62.35,57.1 62.5,57.1 v4(62.925,57.525) 66.475,57.525 67.25,58.3 70.625,58.3 70.75,58.175 70.95,58.175 ; 71.425,58.3 76.325,58.3 v4@77.087,57.537
  Layer 4 w1: v4(77.075,56.575) 77.075,34.9 v4(78,33.975) v4(78,32.25) 78,30.525 95.275,13.25 95.275,9.856 v3(100.323,4.809) 100.8,4.331 v3(100.8,1.6) ; v4@77.975,56.4 87.225,56.4 97.438,46.187 v4(99.925,46.187)
  other v4: 78.9,32.275 78.925,33.025 78.025,33.05 78.9,34 98.9,46.175 42.512,56.186 43.7,56.175 77.975,56.55 62.9,56.625 43.7,57.314 42.512,57.325 61.9,57.5 77.05,57.5 77.95,57.525 70.55,57.8 71.45,57.825 43.7,58.452 42.512,58.463 71.425,58.75 70.525,58.775 43.7,59.591 42.512,59.602 42.512,60.74 43.7,60.73 42.512,61.888 61.45,67.35 62.35,67.375 62.325,68.3 61.425,68.325